# Altium PCB FOOTPRINT.PcbDoc (part 1 of 2)
Units mm, origin at the board's own origin, x right, y up, seen from the top; angles counter-clockwise.
Board outline 50 x 70 mm, 4 copper layers (Top Layer, Int1 (GND), Int2 (PWR), Bottom Layer), stack 1.446 mm thick; 76 components, 55 nets, 299 pads, 366 vias.
Unrouted connection lines stored in the file: 3.
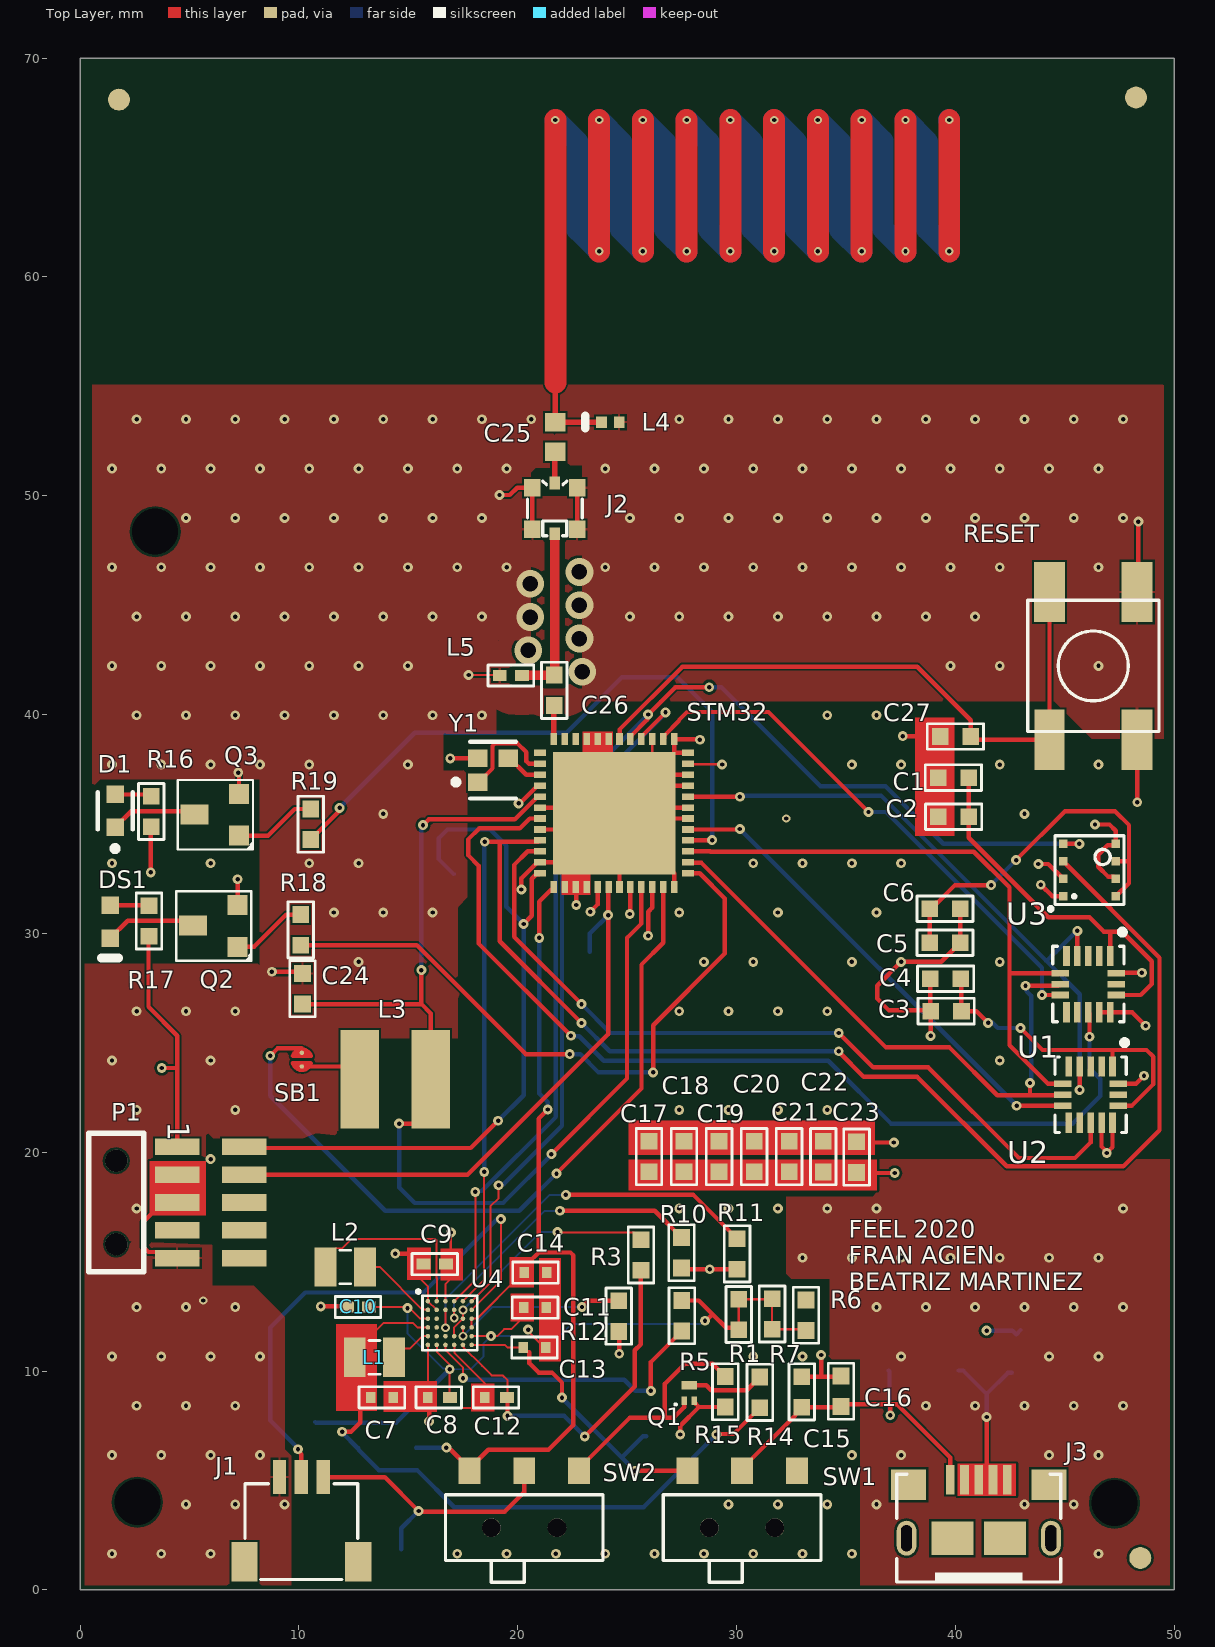
[diagram p0: Top Layer view]
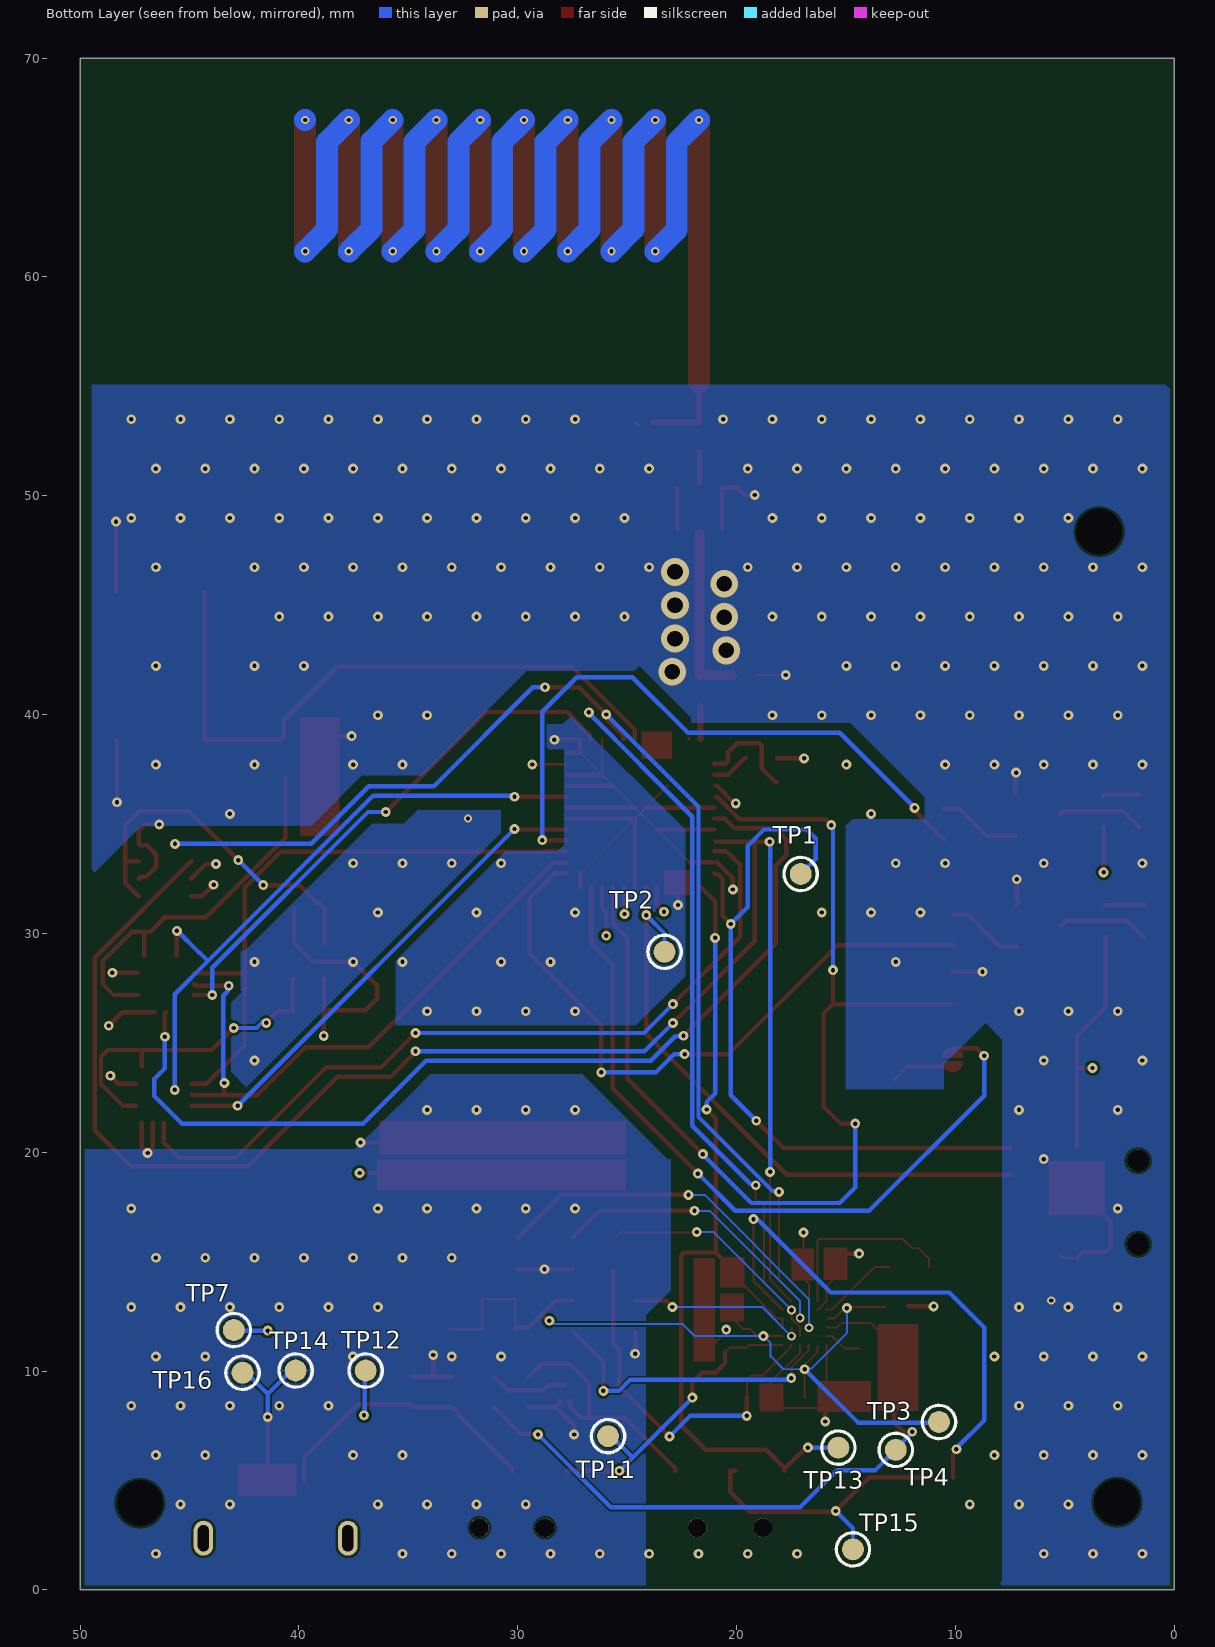
[diagram p1: Bottom Layer view, seen from below]
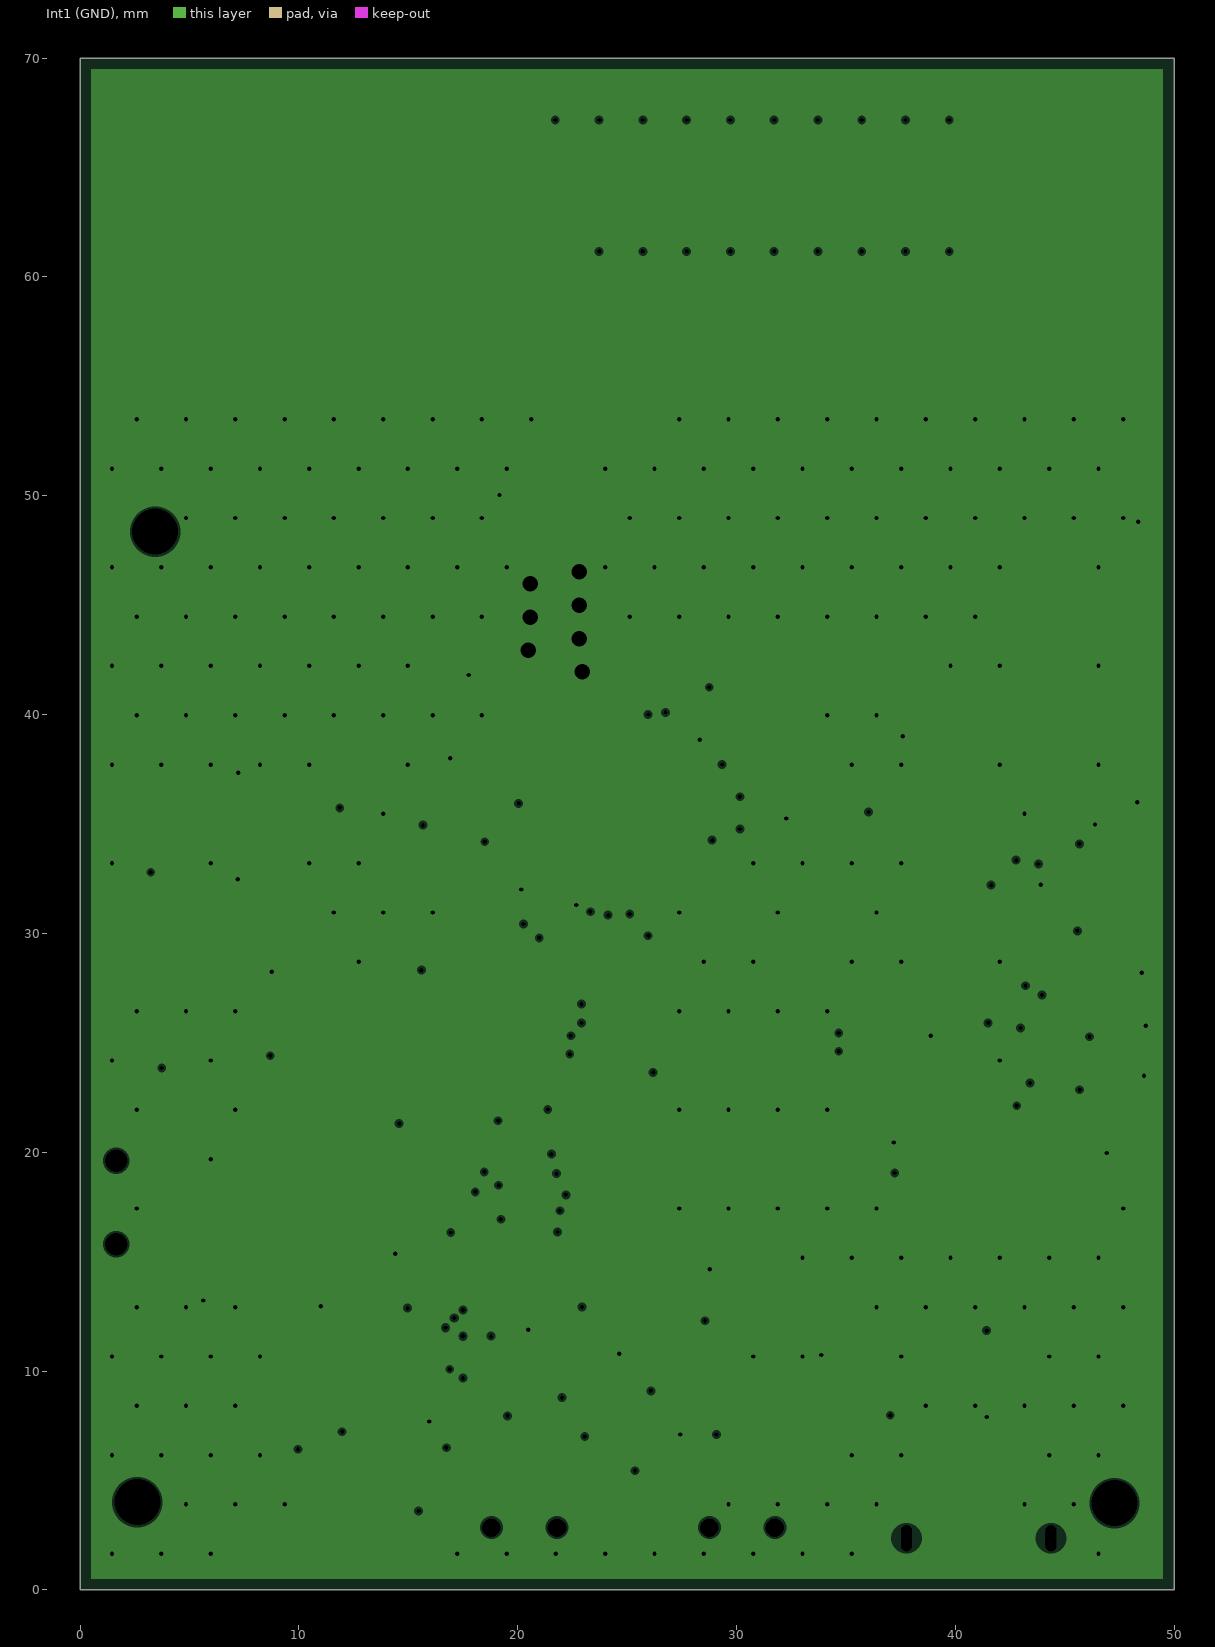
[diagram p2: Int1 (GND), clearances drawn from the general rule]
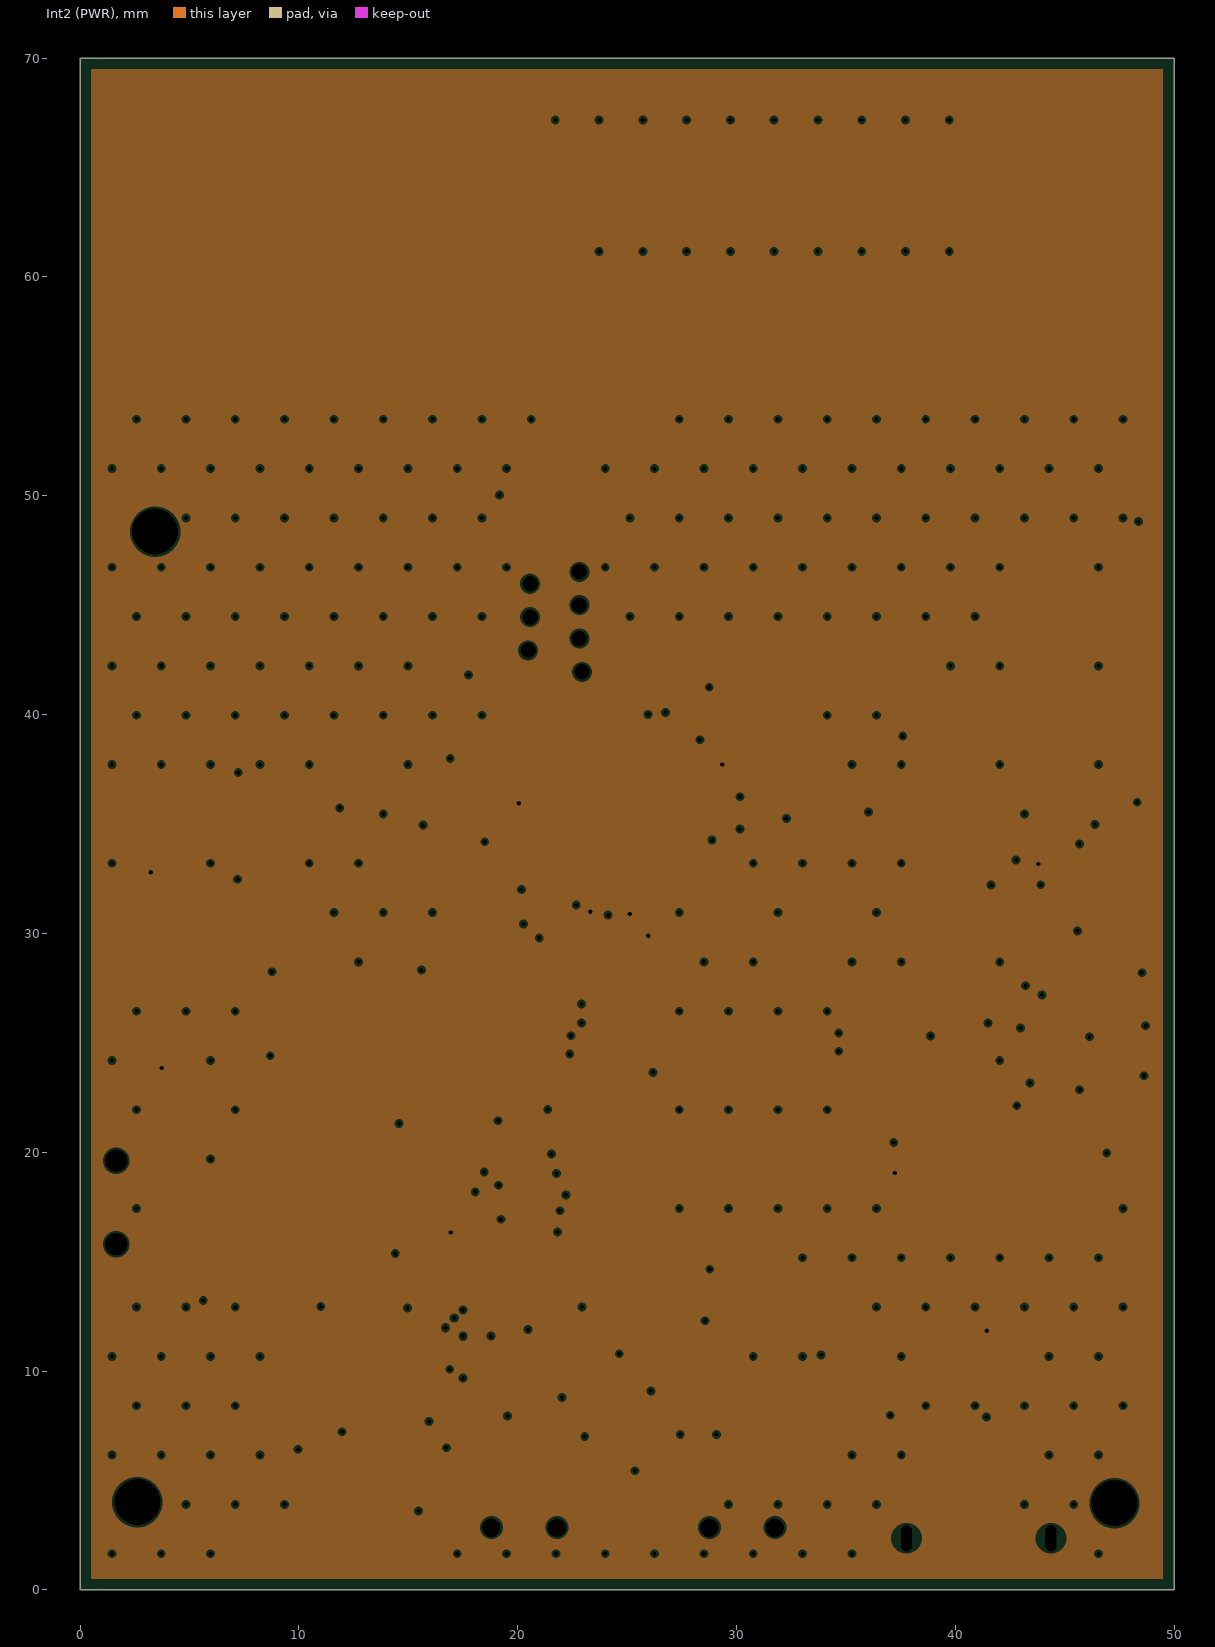
[diagram p3: Int2 (PWR), clearances drawn from the general rule]

## Layer stack, top to bottom
Top Solder: solder mask 0.0254, SM-001, Dk 4
Top Layer: signal copper 0.035
Dielectric 1: prepreg 0.1295, PP-017, Dk 4.3
Dielectric 2: prepreg 0.1295, PP-017, Dk 4.3
Int1 (GND): plane copper 0.035, net GND
Dielectric 3: core 0.7874, Core-040, Dk 4.6
Int2 (PWR): plane copper 0.035, net 3.3VDD
Dielectric 4: prepreg 0.1295, PP-017, Dk 4.3
Dielectric 5: prepreg 0.1295, PP-017, Dk 4.3
Bottom Layer: signal copper 0.035
Bottom Solder: solder mask 0.0254, SM-001, Dk 4

## Board outline
0,0 50,0 50,70 0,70

## Design rules (kind name [scope] priority, off if disabled: settings)
BoardOutlineClearance [All] p1: gap=0.2 ignorepadtopadclearanceinfootprint=FALSE
Clearance [All] p1: gap=0.102 ignorepadtopadclearanceinfootprint=FALSE except(0.01: Arc-SMDPad Arc-Via Track-SMDPad Track-Via; 0.05: Arc-Arc Arc-Track Track-Track SMDPad-Via; 0.09: Arc-Fill Arc-Poly Arc-Region Track-Fill Track-Poly Track-Region; 0.1: Arc-Hole Track-Hole SMDPad-Hole THPad-Hole Via-Hole Fill-Hole Poly-Hole Region-Hole Text-Hole; 0.127: THPad-Via Via-Via Via-Fill Via-Poly Via-Region Via-Text)
ComponentClearance [All] p1: gap=0.102 collisioncheckmode=3 verticalgap=0.102 showdistances=TRUE
DiffPairsRouting [All] p1: maxlimit=0.102 minlimit=0.102 mostfreqgap=0.102 toplayer_minwidth=0.102 toplayer_maxwidth=1816.048 toplayer_prefwidth=0.102 bottomlayer_minwidth=0.102 bottomlayer_maxwidth=1816.048 bottomlayer_prefwidth=0.102 maxuncoupledlength=12.7
Height [All] p1: minheight=0 maxheight=1816.048 prefheight=12.7
HoleSize [All] p1: absolutevalues=TRUE maxlimit=6.3 minlimit=0.2 maxpercent=80.000 minpercent=20.000
HoleToHoleClearance [All] p1: gap=0.25 allowstackedmicrovias=FALSE
MinimumAnnularRing [All] p1: minimumring=0.076
MinimumSolderMaskSliver [All] p1: minsoldermaskwidth=0.1
PlaneClearance [All] p1: clearance=0.102
PlaneConnect PlaneConnectPowerPads [InPadClass('PowerPads')] p1: planeconnectstyle=Direct reliefexpansion=0.508 reliefentries=4 reliefconductorwidth=0.254 reliefairgap=0.254
PlaneConnect [All] p2: pad.planeconnectstyle=Relief pad.reliefexpansion=0.3 pad.reliefentries=4 pad.reliefconductorwidth=0.102 pad.reliefairgap=0.102 via.planeconnectstyle=Direct via.reliefexpansion=0.3 via.reliefentries=4 via.reliefconductorwidth=0.127 via.reliefairgap=0.127
PolygonConnect PolygonConnectPowerPads [All vs (InPadClass('PowerPads'))] p1: connectstyle=Direct reliefconductorwidth=0.254 reliefentries=4 polygonreliefangle="90 Angle" airgapwidth=0.254
PolygonConnect [All] p2: thpad.connectstyle=Relief thpad.reliefconductorwidth=0.102 thpad.reliefentries=4 thpad.polygonreliefangle="90 Angle" thpad.airgapwidth=0.102 smdpad.connectstyle=Relief smdpad.reliefconductorwidth=0.102 smdpad.reliefentries=4 smdpad.polygonreliefangle="90 Angle" smdpad.airgapwidth=0.102 via.connectstyle=Direct via.reliefconductorwidth=0.127 via.reliefentries=4 via.polygonreliefangle="90 Angle" via.airgapwidth=0.127
RoutingVias [All] p1: holewidth=0.1 width=0.25 viastyle="Through Hole" minholewidth=0.1 minwidth=0.2 maxholewidth=6.3 maxwidth=6.55
SilkToSilkClearance [All] p1: silktosilkclearance=0
SilkToSolderMaskClearance [IsPad] p1: minsilkscreentomaskgap=0.102 clearancetoexposedcopper=TRUE
SolderMaskExpansion [All] p1: expansion=0.075 istentingtop=FALSE
Width [All] p1: maxlimit=1816.048 minlimit=0.09 preferedwidth=0.102 minimp=50.000000 maximp=50.000000 favimp=50.000000
20 further rules are at their usual default settings.

## Classes and differential pairs
component class U_STM32_breakout: *1 C17 C18 C19 C20 C21 C22 C23 C24 C25 C26 J2 L3 L4 L5 SB1 STM32 Y1
component class Sensors: C1 C2 C3 C4 C5 C6 U1 U2 U3
component class JTAG: P1 TP1 TP2
component class Connections: C27 D1 DS1 Q2 Q3 R16 R17 R18 R19 RESET
component class Bateria: C7 C8 C9 C10 C11 C12 C13 C14 C15 C16 J1 J3 L1 L2 Q1 R1 R3 R5 R6 R7 R10 R11 R12 R14 R15 SW1 SW2 TP3 TP4 TP7 TP11 TP12 TP13 TP14 TP15 TP16 U4

## Components (designator, comment, footprint, x,y, rotation, side; value= is the part's Value field where it differs from the comment)
C1 "100nF" 0603C-GENERIC 40.607,37.119 r180 top
C2 "100nF" 0603C-GENERIC 40.615,35.331 r180 top
C3 "100nF" 0603C-GENERIC 40.275,26.45 r180 top
C4 "100nF" 0603C-GENERIC 40.25,27.925 r180 top
C5 "100nF" 0603C-GENERIC 38.826,29.573 r0 top
C6 "100nF" 0603C-GENERIC 38.828,31.125 r0 top
C7 "22uF" 0402C-TBD#1 13.284,8.8 r0 top
C8 "1uF" 0402C-GENERIC#1 16.9,8.8 r180 top
C9 "2nF" 0402C-TBD#2 16.713,14.884 r180 top
C10 "1uF" 0402C-GENERIC#2 13.208,12.929 r180 top
C11 "10uF" 0402C-GENERIC#3 20.284,12.9 r0 top
C12 "1uF" 0402C-GENERIC#1 19.516,8.8 r180 top
C13 "2u2" 0402C-GENERIC#3 20.258,11.074 r0 top
C14 "4u7" 0402C-GENERIC#3 20.3,14.5 r0 top
C15 "10uF" 0603C-GENERIC 32.975,8.35 r90 top
C16 "100nF" 0603C-GENERIC 34.775,8.378 r90 top
C17 "100nF" 0603C-GENERIC 26,19.103 r90 top
C18 "100nF" 0603C-GENERIC 27.6,19.103 r90 top
C19 "4u7" 0603C-GENERIC 29.2,19.103 r90 top
C20 "4u7" 0603C-GENERIC 30.8,19.103 r90 top
C21 "4u7" 0603C-GENERIC 32.4,19.103 r90 top
C22 "10nF" 0603C-GENERIC 33.96,19.101 r90 top
C23 "1uF" 0603C-GENERIC 35.484,19.075 r90 top
C24 "470nF" 0603C-GENERIC 10.16,26.772 r90 top
C25 "GRM1885C1H1R0CA01D" CAPC1608X90X35NL10T15 21.717,52.68 r90 top
C26 "TBD" 0603C-GENERIC 21.666,40.411 r90 top
C27 "100nF" 0603C-GENERIC 40.697,39 r180 top
D1 "LTST-C190GKT" FP-LTST-C190GKT-MFG 1.6,35.6 r90 top
DS1 "LTST-C190AKT" LTST-C190AKT-2_V 1.372,30.531 r270 top
J1 "HDR-3, 1mm" SM03B-SRSS-TB 10.109,5.156 r0 top
J2 "MM8130-2600" COAXIAL-SWF 21.692,49.42 r0 top
J3 "MicroUSB-B" USB-Micro-B-RA-SMD-PiP 41.066,5.037 r90 top
L1 "2.2µH" INDC2016X18N 13.551,10.623 r180 top
L2 "2.2µH" INDC2016X18N 12.217,14.757 r180 top
L3 "744773115" WE-PD2-S 14.402,23.343 r0 top
L4 "LQG15HS12NJ02D" INDC1005X55X25LL05T10_A 24.232,53.365 r0 top
L5 "TBD" 0402C-TBD#2 20.193,41.783 r180 top
P1 "Pin Header 2x5" HDR_2x5-SMD-1.27mm-ANG 5.97,17.704 r270 top
Q1 "RV2C010UNT2L" DFN65P100X40-3L 27.838,8.997 r90 top
Q2 "MMBT2222" SOT23-BCE 7.188,29.388 r180 top
Q3 "MMBT2222" SOT23-BCE 7.264,34.468 r180 top
R1 "2R2" 0603R-GENERIC 30.099,11.887 r90 top
R3 "10K" 0603R-10K 25.629,16.002 r270 top
R5 "N.C." 0603R-GENERIC 27.5,13.225 r270 top
R6 "1M" 0603R-GENERIC 33.175,11.853 r90 top
R7 "2R2" 0603R-GENERIC 31.623,11.913 r90 top
R10 "1M" 0603R-GENERIC 27.483,14.707 r90 top
R11 "10K" 0603R-10K 30.023,16.053 r270 top
R12 "10K" 0603R-10K 24.612,13.208 r270 top
R14 "1K" 0603R-1k 31.064,8.331 r90 top
R15 "10M" 0603R-GENERIC 29.489,9.754 r270 top
R16 "47R" 0603R-47 3.251,34.874 r90 top
R17 "47R" 0603R-47 3.15,31.267 r270 top
R18 "1K" 0603R-1k 10.084,29.464 r90 top
R19 "1K" 0603R-1k 10.541,34.29 r90 top
RESET "PB SW" Switch-PB-6.2x6.3mm-SMD 46.3,42.225 r90 top
SB1 "Solderbridge" Solderbridge 10.135,24.232 r270 top
STM32 "STM32WLE5CC" stm32wle5cc 24.4,35.5 r180 top
SW1 "AYZ0102AGRLC" AYZ0102AGRLC 30.253,2.845 r0 top
SW2 "AYZ0102AGRLC" AYZ0102AGRLC 20.295,2.845 r0 top
TP1 "Ø1.0mm,SMD" TP_SMD_Ø1.0mm 17.069,32.715 r180 bottom
TP2 "Ø1.0mm,SMD" TP_SMD_Ø1.0mm 23.292,29.159 r90 bottom
TP3 "Ø1.0mm,SMD" TP_SMD_Ø1.0mm 10.75,7.675 r90 bottom
TP4 "Ø1.0mm,SMD" TP_SMD_Ø1.0mm 12.725,6.4 r90 bottom
TP7 "Ø1.0mm,SMD" TP_SMD_Ø1.0mm 42.975,11.875 r90 bottom
TP11 "Ø1.0mm,SMD" TP_SMD_Ø1.0mm 25.875,7.025 r90 bottom
TP12 "Ø1.0mm,SMD" TP_SMD_Ø1.0mm 36.95,10.025 r90 bottom
TP13 "Ø1.0mm,SMD" TP_SMD_Ø1.0mm 15.35,6.5 r90 bottom
TP14 "Ø1.0mm,SMD" TP_SMD_Ø1.0mm 40.15,10.025 r90 bottom
TP15 "Ø1.0mm,SMD" TP_SMD_Ø1.0mm 14.681,1.854 r90 bottom
TP16 "Ø1.0mm,SMD" TP_SMD_Ø1.0mm 42.577,9.924 r90 bottom
U1 "ADXL362" LGA50P322X300X114-16N 46.076,27.686 r270 top
U2 "ADXL372" LGA50P322X300X114-16N 46.177,22.631 r270 top
U3 "BME680" BME680 46.126,32.893 r180 top
U4 "ADP536x" BGA32C40P6X6_238X238X56 16.896,12.196 r0 top locked
Y1 "402F32011CAR" FP-402-MFG 18.872,37.465 r0 top

## Footprints (in the part's own frame and the unit in brackets; to place one, negate y for a bottom-side part, rotate by r counter-clockwise, add the part's x,y. Pads: shape width x height; smd on the part's side, far side on the other; paste and mask are expansions set on the pad)
0402C-GENERIC#1 [mil]
  rect 25x20 smd: 1(0,0)
  rect 17.13x20 smd: 2(40,0)
  silkscreen extent -21,-19 61,19
0402C-GENERIC#2 [mil]
  rect 25x20 smd: 1(0,0) 2(40,0)
  silkscreen extent -21,-19 61,19
0402C-GENERIC#3 [mil]
  rect 17.13x20 smd: 1(0,0) 2(40,0)
  silkscreen extent -21,-19 61,19
0402C-TBD#1 [mil]
  rect 17.13x20 smd: 1(0,0) 2(40,0)
  silkscreen extent -21,-19 61,19, body extent 2,-9 39,9, height 19
0402C-TBD#2 [mil]
  rect 25x20 smd: 1(0,0) 2(40,0)
  silkscreen extent -21,-19 61,19, body extent 2,-9 39,9, height 19
0603C-GENERIC [mil] "CAPACITOR 0603"
  rect 30x30 smd: 1(0,0) 2(55,0)
  silkscreen extent -23,-23 78,23, body extent -4,-15 59,15, height 19
0603R-1k [mil] "RESISTOR 0603"
  rect 30x30 smd: 1(0,0) 2(55,0)
  silkscreen extent -23,-23 78,23, body extent -4,-15 59,15, height 20
0603R-10K [mil] "RESISTOR 0603"
  rect 30x30 smd: 1(0,0) 2(55,0)
  silkscreen extent -23,-23 78,23, body extent -4,-15 59,15, height 20
0603R-47 [mil] "RESISTOR 0603"
  rect 30x30 smd: 1(0,0) 2(55,0)
  silkscreen extent -23,-23 78,23, body extent -4,-15 59,15, height 20
0603R-GENERIC [mil] "RESISTOR 0603"
  rect 30x30 smd: 1(0,0) 2(55,0)
  silkscreen extent -23,-23 78,23, body extent -4,-15 59,15, height 19
AYZ0102AGRLC [mm]
  round 0.85 hole 0.85 unplated: 0(-1.5,0) 0(1.5,0)
  rect 1x1.2 smd: 1(-2.5,2.6) 2(0,2.6) 3(2.5,2.6)
  silkscreen extent -3.6,-2.5 3.6,1.5, body extent -3.6,-2.5 3.6,2.8, height 1.5
BGA32C40P6X6_238X238X56 [mm]
  round 0.21 smd mask+0.05: A1(-1,1) A2(-0.6,1) A3(-0.2,1) A4(0.2,1) A5(0.6,1) A6(1,1) B1(-1,0.6) B2(-0.6,0.6) B3(-0.2,0.6) B4(0.2,0.6) B5(0.6,0.6) B6(1,0.6) C1(-1,0.2) C2(-0.6,0.2) C5(0.6,0.2) C6(1,0.2) D1(-1,-0.2) D2(-0.6,-0.2) D5(0.6,-0.2) D6(1,-0.2) E1(-1,-0.6) E3(-0.2,-0.6) E4(0.2,-0.6) E5(0.6,-0.6) E6(1,-0.6) F1(-1,-1) F2(-0.6,-1) F3(-0.2,-1) F4(0.2,-1) F5(0.6,-1) F6(1,-1) ""(-0.6,-0.6)
  silkscreen extent -1.49,-1.25 1.25,1.49, body extent -1.19,-1.19 1.19,1.19, height 0.56
BME680 [mm]
  rect 0.4x0.4 smd mask+0.1: 1(1.2,1.2) 2(1.2,0.4) 3(1.2,-0.4) 4(1.2,-1.2) 5(-1.2,-1.2) 6(-1.2,-0.4) 7(-1.2,0.4) 8(-1.2,1.2)
  silkscreen extent -1.58,-1.58 1.82,1.82, body extent -1.5,-1.5 1.5,1.5, height 0.93
CAPC1608X90X35NL10T15 [mm] "Chip Capacitor, 2-Leads, Body 1.60x0.80mm, IPC Medium Density"
  rect 0.85x0.95 smd: 1(-0.675,0) 2(0.675,0)
  body extent -0.85,-0.45 0.85,0.45, height 0.9
COAXIAL-SWF [mm]
  rect 0.5x0.58 smd: 1(0,1.16) 3(0,-1.16)
  rect 0.75x0.8 smd: 2(-1.025,-0.95) 2(-1.025,0.95) 2(1.025,-0.95) 2(1.025,0.95)
  Top Layer pour cut-out: 0.65,-0.55 -0.65,-0.55 -0.65,-1.35 0.65,-1.35
  Top Layer pour cut-out: -0.65,0.55 0.65,0.55 0.65,1.35 -0.65,1.35
  silkscreen extent -1.25,-1.25 1.25,1.25, body extent -1.26,-1.3 1.26,1.3, height 1.55
DFN65P100X40-3L [mm]
  rect 0.4x0.25 smd: 1(-0.35,0.225) 2(-0.35,-0.225)
  rect 0.4x0.7 smd: 3(0.35,0)
  silkscreen extent -0.57,0.57 -0.48,0.67, body extent -0.53,-0.32 0.52,0.33, height 0.4
FP-402-MFG [mm]
  rect 0.9x0.8 smd paste+0 mask+0: 1(-0.7,-0.55) 3(0.7,0.55) 4(-0.7,0.55)
  rect 0.9x0.8 on Plane1 paste+0 mask+0: 2(0.7,-0.55)
  silkscreen extent -1.82,-1.3 1.05,1.3, body extent -1.25,-1.05 1.25,1.05, height 0.25
FP-LTST-C190GKT-MFG [mm]
  rect 0.8x0.8 smd paste+0 mask+0: 1(-0.75,0) 2(0.75,0)
  silkscreen extent -1.85,-0.8 0.85,0.8, body extent -1.25,-0.55 1.25,0.55, height 0.25
HDR_2x5-SMD-1.27mm-ANG [mm]
  round 1.02 hole 1.02 unplated: 0(-1.905,-4.32) 0(1.905,-4.32)
  rect 0.76x2.03 smd: 1(-2.54,-1.525) 2(-2.54,1.525) 3(-1.27,-1.525) 4(-1.27,1.525) 5(0,-1.525) 6(0,1.525) 7(1.27,-1.525) 8(1.27,1.525) 9(2.54,-1.525) 10(2.54,1.525)
  silkscreen extent -3.17,-5.57 3.17,-3.07, body extent -3.18,-8.63 3.17,2.27, height 3.41
INDC1005X55X25LL05T10_A [mm] "Chip Inductor, 2-Leads, Body 1.05x0.55mm, IPC High Density"
  rect 0.49x0.52 smd: 1(-0.405,0) 2(0.405,0)
  silkscreen extent -1.15,-0.28 -1.15,0.28, body extent -0.52,-0.28 0.53,0.28, height 0.55
INDC2016X18N [mm]
  rect 1x1.8 smd: 1(-0.8,0) 2(1,0)
  silkscreen extent -0.15,-0.77 0.35,0.77, body extent -0.9,-0.8 1.1,0.8, height 1
LGA50P322X300X114-16N [mm]
  rect 0.925x0.3 smd mask+0.06: 1(-1.288,1) 2(-1.288,0.5) 3(-1.288,0) 4(-1.288,-0.5) 5(-1.288,-1) 9(1.288,-1) 10(1.288,-0.5) 11(1.288,0) 12(1.288,0.5) 13(1.288,1)
  rect 0.3x0.8 smd mask+0.06: 6(-0.5,-1.275) 7(0,-1.275) 8(0.5,-1.275) 14(0.5,1.275) 15(0,1.275) 16(-0.5,1.275)
  silkscreen extent -2.5,-1.62 1.72,1.68, body extent -1.65,-1.55 1.65,1.55, height 1.14
LTST-C190AKT-2_V [mm] "SMD, 2-Leads, Body 1.6x0.8mm"
  rect 0.8x0.8 smd: 1(-0.75,0) 2(0.75,0)
  silkscreen extent 1.65,-0.4 1.65,0.4, body extent -0.8,-0.4 0.8,0.4, height 0.8
SM03B-SRSS-TB [mm]
  rect 1.2x1.8 smd: 0(-2.6,-3.875) 0(2.6,-3.875)
  rect 0.6x1.55 smd: 1(-1,0) 2(0,0) 3(1,0)
  silkscreen extent -2.57,-4.68 2.58,-0.3, body extent -2.5,-4.61 2.5,0.34, height 2.95
Solderbridge [mm]
  round 0.2 smd paste-10: 1(-0.312,0) 2(0.312,0)
  Top Layer region: -0.077,-0.432 -0.152,-0.505 -0.271,-0.467 -0.335,-0.424 -0.409,-0.351 -0.462,-0.292 -0.521,-0.193 -0.549,-0.099 -0.544,0.122 -0.518,0.193 -0.434,0.33 -0.351,0.411 -0.259,0.469 -0.157,0.5 -0.107,0.483 -0.077,0.43
  Top Layer region: 0.077,0.432 0.152,0.505 0.271,0.467 0.335,0.424 0.409,0.351 0.462,0.292 0.521,0.193 0.549,0.099 0.544,-0.122 0.518,-0.193 0.434,-0.33 0.351,-0.411 0.259,-0.469 0.157,-0.5 0.107,-0.483 0.077,-0.43
  Top Layer lines w0.152: 0.153,-0.431 ccw(c0.042,0) 0.312,-0.353 ccw(c0.042,0) 0.381,-0.288 ccw(c0.042,0) 0.461,-0.149 ccw(c0.042,0) 0.312,0.353 ccw(c0.042,0) 0.153,0.431 ; -0.153,-0.431 cw(c-0.042,0) -0.254,-0.391 cw(c-0.042,0) -0.258,-0.389 cw(c-0.042,0) -0.487,0 cw(c-0.042,0) -0.258,0.389 cw(c-0.042,0) -0.254,0.391 cw(c-0.042,0) -0.153,0.431
SOT23-BCE [mil]
  rect 36x36 smd mask+1.97: B(0,0)
  rect 50x36 smd mask+1.97: C(80,-38)
  rect 36x36 smd: E(0,-75)
  silkscreen extent -25,-100 110,25, body extent -3,-95 94,20, height 41
stm32wle5cc [mm]
  rect 0.55x0.3 smd mask+0.05: 1(-3.375,2.75) 2(-3.375,2.25) 3(-3.375,1.75) 4(-3.375,1.25) 5(-3.375,0.75) 6(-3.375,0.25) 7(-3.375,-0.25) 8(-3.375,-0.75) 9(-3.375,-1.25) 10(-3.375,-1.75) 11(-3.375,-2.25) 12(-3.375,-2.75) 25(3.375,-2.75) 26(3.375,-2.25) 27(3.375,-1.75) 28(3.375,-1.25) 29(3.375,-0.75) 30(3.375,-0.25) 31(3.375,0.25) 32(3.375,0.75) 33(3.375,1.25) 34(3.375,1.75) 35(3.375,2.25) 36(3.375,2.75)
  rect 0.3x0.55 smd mask+0.035: 13(-2.75,-3.375)
  rect 0.3x0.55 smd mask+0.05: 14(-2.25,-3.375) 15(-1.75,-3.375) 16(-1.25,-3.375) 17(-0.75,-3.375) 18(-0.25,-3.375) 19(0.25,-3.375) 20(0.75,-3.375) 21(1.25,-3.375) 22(1.75,-3.375) 23(2.25,-3.375) 24(2.75,-3.375) 37(2.75,3.375) 38(2.25,3.375) 39(1.75,3.375) 40(1.25,3.375) 41(0.75,3.375) 42(0.25,3.375) 43(-0.25,3.375) 44(-0.75,3.375) 45(-1.25,3.375) 46(-1.75,3.375) 47(-2.25,3.375) 48(-2.75,3.375)
  rect 5.6x5.6 smd: 49(0,0)
  body extent -3.51,-3.51 3.51,3.51, height 0.5
Switch-PB-6.2x6.3mm-SMD [mm]
  rect 2.75x1.39 smd: 1(-3.375,2)
  rect 2.75x1.4 smd: 1(3.375,2) 2(-3.375,-2) 2(3.375,-2)
  silkscreen extent -3,-3 3,3, body extent -4,-3 4,3.3, height 3.1
TP_SMD_Ø1.0mm [mm]
  round 1 smd paste-5: 1(0,0)
  silkscreen extent -0.76,-0.76 0.76,0.76
USB-Micro-B-RA-SMD-PiP [mm]
  rect 1.35x0.4 smd: 1(0,1.3) 2(0,0.65) 3(0,0) 4(0,-0.65) 5(0,-1.3)
  oval 1.6x0.9 hole 0.5 slot 1.2 at 0 deg: 6(-2.675,3.3) 6(-2.675,-3.3)
  oval 2x1.5 on Top Paste: 6(-2.675,3.3) 6(-2.675,-3.3)
  rect 1.55x1.9 smd: 6(-2.675,-1.2) 6(-2.675,1.2)
  rect 1.4x1.6 smd: 6(-0.225,3.2) 6(-0.225,-3.2)
  silkscreen extent -4.75,-3.75 0.25,3.75, body extent -5.28,-4.1 0.15,4.1, height 2.72
WE-PD2-S [mm] "SMD Inductor, 2-Leads, Body 4.5 x 4.0 mm"
  rect 1.75x4.5 smd: 1(-1.625,0) 2(1.625,0)
  body extent -2.23,-2 2.23,2, height 3.17

## Part data
C1 C2 C3 C4 C5 C6 C17 C18 C27: library part 0603C-100NF-50V-X7R-TDK, "CAPACITOR 0603 CERAMIC", Capacitance=10000pF, Manufacturer="TDK Corporation", Manufacturer Part Number=C1608X7R1H103K, Operating Temperature="-55°C ~ 125°C", Package / Case="0603 (1608 metric)", Supplier Part Number 1=445-1314-2-ND, Temperature Coefficient=X7R, Tolerance=±10%, Voltage - Rated=50V, Category=Capacitors, Features="General Purpose", Lead Spacing=-, Mounting Type="Surface Mount, MLCC", Packaging="Tape & Reel (TR)", Reel=C68, RoHS="RoHS Compliant", Supplier 1=Digi-Key, Thickness=0.80mm
C7 C8 C9 C10 C11 C14: library part 0402C-10UF-4V-X5R-SAM, "CAPACITOR 0402 CERAMIC", Reel=C47
C12: library part 0402C-1UF-25V-X5R-SAM, "CAPACITOR 0402 CERAMIC", Reel=C49
C13: library part 0402C-2U2-10V-X5R-SAM, "CAPACITOR 0402 CERAMIC", Reel=C16
C15: library part 0603C-10UF-10V-X5R-TDK, "CAPACITOR 0603 CERAMIC", Manufacturer="TDK Corporation", Manufacturer Part Number=C1608X5R0J106M, Supplier Part Number 1=445-4112-2-ND, Reel=C31, Supplier 1=Digi-Key
C16: library part 0603C-100NF-25V-X7R-TDK, "CAPACITOR 0603 CERAMIC", Manufacturer="TDK Corporation", Manufacturer Part Number=C1608X7R1E104K, Supplier Part Number 1=445-1316-2-ND, Reel=C12, Supplier 1=Digi-Key
C19 C20 C21: library part 0603C-4U7-6V3-X5R-KEM, "CAPACITOR 0603 CERAMIC", Reel=C36
C22: library part 0603C-10NF-50V-X7R-MUR, "CAPACITOR 0603 CERAMIC", Manufacturer="Murata Electronics North America", Manufacturer Part Number=GRM188R71H103KA01D, Supplier Part Number 1=490-1512-2-ND, Reel=C22, Supplier 1=Digi-Key
C23: library part 0603C-1UF-25V-X5R-SAM, "CAPACITOR 0603 CERAMIC", Reel=C17
C24: library part 0603C-470NF-25V-X7R-MUR, "CAPACITOR 0603 CERAMIC", Capacitance=0.47µF, Manufacturer="Murata Electronics North America", Manufacturer Part Number=GRM188R71E474KA12D, Operating Temperature="-55°C ~ 125°C", Package / Case="0603 (1608 metric)", Supplier Part Number=490-3291-2-ND, Temperature Coefficient=X7R, Tolerance=±10%, Voltage - Rated=25V, Category=Capacitors, Features="General Purpose", Lead Spacing=-, Mounting Type="Surface Mount, MLCC", Packaging="Tape & Reel (TR)", Reel=C14, RoHS="RoHS Compliant", Supplier=Digi-Key, Supplier 1=Digi-Key, Supplier Part Number 1=490-3291-2-ND, Thickness=0.80mm
C25: library part CMP-2006-02464-1, Manufacturer=Murata, Part Number=GRM1885C1H1R0CA01D
C26: library part 0603C-000, "CAPACITOR 0603 CERAMIC"
D1: library part CMP-22017-000005-1, "LED GREEN CLEAR CHIP SMD", Case Code (Imperial)=0603, Case Code (Metric)=1608, Color=Green, Forward Current=30mA, Forward Voltage=2.1V, Lens Color=Colorless, Max Operating Temperature=85°C, Min Operating Temperature=-55°C, Package Quantity=1, Power Dissipation=100mW, Reverse Voltage=5V, Test Current=10mA, Voltage=2V, Case/Package=0603, Depth=0.8mm, Dominant Wavelength=569nm, Height=0.8mm, Illumination Color=Green, Lead Free="Lead Free", Length=1.6mm, Lens Style=Clear, Lens Transparency=Clear, Luminous Intensity=6mcd, Mount="Surface Mount", Number of Elements=1, Number of LEDs=1, Number of Pins=2, Packaging="Tape and Reel", Power Rating=100mW, Radiation Hardening=No, Viewing Angle=130°, Wavelength=565nm, Width=0.8mm
DS1: library part CMP-1674-00006-1, "Single Color Chip LED, 2.1 V, 2 mcd, -55 to 85 degC, 2-Pin SMD, RoHS, Tape and Reel", ComponentLink1Description="Manufacturer URL", ComponentLink1URL=http://www.us.liteon.com/, ComponentLink2Description=Datasheet, ComponentLink2URL=http://datasheet.octopart.com/LTST-C190AKT-Lite-On-datasheet-11729267.pdf, DatasheetVersion=Jan-03, PackageDescription="2-Pin Surface Mount Device, Body 1.6 x 0.8 mm", PackageReference=LTST-C190AKT-2
J1: library part SM03B-SRSS-TB, "1.0mm pitch connector side entry SMD", Manufacturer=JST, Manufacturer Part Number=SM03B-SRSS-TB(LF)(SN), Part number IPS=00000001785, Supplier Part Number 1=455-1803-1-ND, Artikkelnr Noca=N.A., ComponentLink1Description=Datasheet, ComponentLink2Description="Supplier link", Footprint Doc=SM03B-SRSS-TB, HelpURL=http://www.jst-mfg.com/product/pdf/eng/eSH.pdf, LatestRevisionDate=2017-10-09, Note="JST, Header", Part Number=SM03B-SRSS-TB, Pin Count=3, Published=2017-10-09, Publisher="Nordic Semiconductor", Supplier 1=Digi-Key
J2: "Coaxial Connector with Switch", Manufacturer=Murata, Part number IPS=00000009955, Supplier Part Number 1=490-4981-1-ND, Artikkelnr Noca=55029011, ComponentLink1Description=Datasheet, ComponentLink2Description="Supplier link", Footprint Doc=COAXIAL-SWF, HelpURL=http://www.murata.com/products/catalog/pdf/o33e.pdf, LatestRevisionDate=2014-04-24, Manufacturer Part Number=MM8130-2600, Part Number=MM8130-2600, Pin Count=3, Published=2014-04-24, Publisher="Nordic Semiconductor", Supplier 1=Digi-Key, Supplier 2=Mouser, Supplier Part Number 2=81-MM8130-2600RA2
J3: library part MiniUSB-AB-SMT, "MicroUSB-B-SMT", Manufacturer="Allen Creations Corp.", Manufacturer Part Number=AJU55-BS2111-L, Part Number=USB-Micro-B-RA-SMD-PiP, Part number IPS=00000007790, Artikkelnr Noca=55029020, ComponentLink1Description=Datasheet, ComponentLink2Description="Supplier link", Footprint Doc=USB-Micro-B-RA-SMD-PiP, HelpURL="\\hizz\pro\app9717\Datasheet\connectores\Allen Creations Corp\AJU-211.pdf", LatestRevisionDate=2016-04-21, Pin Count=5, Published=2014-10-07, Publisher="Nordic Semiconductor", Supplier 1=Cabcon, Supplier 2=Digi-Key, Supplier Part Number 1=AJU55-BS2111-L, Supplier Part Number 2=609-4616-1-ND
L1 L2: library part LQM2MPN4R7NG0L, "Inductor Power Chip Shielded Multi-Layer 4.7uH 30% 1MHz Ferrite 1.1A 175mOhm DCR 0806 T/R", Package=None, Availability=Unavailable, MP=LQM2MPN4R7NG0L, Price=None
L3: library part CMP-0227-00515-1, "SMD Power Inductor WE-PD2, L = 15.0 µH", Inductance="15.0 ÂµH", ComponentLink1Description="Manufacturer Link", ComponentLink1URL=http://www.we-online.com, ComponentLink2Description=Datasheet, ComponentLink2URL=http://www.we-online.de/katalog/media/pdf/744773115.pdf, DatasheetVersion="ver 1, Oct-2004", PackageDescription="SMD Inductor, 2-Leads, Body 4.5 x 4.0 mm", PackageReference=WE-PD2-S, PackageVersion=2004
L4: library part CMP-2000-06576-1, "Chip Inductor, 12 nH, +/-5%, 300 mA, -55 to 125 degC, 0402 (1005 Metric), RoHS, Tape and Reel", Case Size/Dimension=0402, DC Resistance=0.28O, Inductance-Nom=12nH, Manufacturer=Murata, Package Description="2-Pin Surface Mount Device, Body 1 x 0.5 mm", Rated Current-Max=300mA, Tolerance (%)=±5%, Datasheet URL=http://search.murata.co.jp/Ceramy/image/img/PDF/ENG/L0075S0083LQG15HS.pdf, Datasheet Version=09/2010, Manufacturer URL=http://www.murata.com/, Mounting Technology=SurfaceMount, Package Reference=0402
L5: library part INDUCTOR, "INDUCTOR"
P1: library part "Pin Header 2x5 SMD, 1.27mm, Angled", "Pin Header 2x5, 1.27mm (50mil)", Manufacturer=Samtec, Manufacturer Part Number=FTSH-105-01-L-DH-A-C-TR, Part number IPS=00000007800, Artikkelnr Noca=N.A., ComponentLink1Description=Datasheet, ComponentLink2Description="Supplier link", Footprint Doc=HDR_2x5-SMD-1.27mm-ANG, HelpURL=http://www.samtec.com/documents/webfiles/pdf/FTSH_SMT.PDF, LatestRevisionDate=2014-01-22, Part Number="Pin Header 2x5 SMD, 1.27mm, Angled", Pin Count=10, Published=2014-01-22, Publisher="Nordic Semiconductor", Supplier 1=Samtec, Supplier Part Number 1=FTSH-105-01-L-DH-A-C-TR
Q1: "N-Channel MOSFET, 20V, 1A, 470mOhm, 400mW", Manufacturer="Rohm Semiconductor", Part number IPS=N.A., Supplier Part Number 1=RV2C010UNT2LCT-ND, Artikkelnr Noca=35010020, ComponentLink1Description=Datasheet, ComponentLink2Description="Supplier link", Footprint Doc=DFN-3, HelpURL=http://rohmfs.rohm.com/en/products/databook/datasheet/discrete/transistor/mosfet/rv2c010unt2l-e.pdf, LatestRevisionDate=2016-08-09, Manufacturer Part Number=RV2C010UNT2L, Part Number=RV2C010UNT2L, Pin Count=3, Published=2016-08-09, Publisher="Nordic Semiconductor", Supplier 1=Digi-Key, Supplier 2=Mouser, Supplier Part Number 2=755-RV2C010UNT2L
Q2 Q3: "BC847 SMALL SIGNAL NPN TRANSISTOR", Supplier Part Number 1=MMBT2222A-FDICT-ND, Supplier 1=Digi-Key
R1 R7: library part 0603R-000, "2R2 Resistor"
R3 R11 R12: library part 0603R-10K, "GENERIC RESISTOR 0603", Case="0603 (1608 metric)", Manufacturer="Stackpole Electronics Inc", Manufacturer Part Number="RMCF 1/16 10K 1% R", Power (Watts)="0.1W, 1/10W", Resistance In Ohms=10.0K, Supplier Part Number=RMCF1/1610KFRDKR-ND, Supplier Part Number 1=RMCF0603FT10K0DKR-ND, Temperature Coefficient=±100ppm/°C, Tolerance=±1%, Category=Resistors, Composition="Thick Film", Lead Style="Surface Mount (SMD - SMT)", Packaging=Digi-Reel®, Reel=R21, RoHS="RoHS Compliant", Supplier=Digi-Key, Supplier 1=Digi-Key
R5: library part 0603R-000
R6 R10: library part 0603R-1M, "GENERIC RESISTOR 0603", Case="0603 (1608 metric)", Manufacturer="Stackpole Electronics Inc", Manufacturer Part Number="RMCF 1/16 1M 1% R", Power (Watts)="0.1W, 1/10W", Resistance In Ohms=1.00M, Supplier Part Number=RMCF1/161MFRTR-ND, Supplier Part Number 1=RMCF0603FT1M00TR-ND, Temperature Coefficient=±100ppm/°C, Tolerance=±1%, Category=Resistors, Composition="Thick Film", Lead Style="Surface Mount (SMD - SMT)", Packaging="Tape & Reel (TR)", Reel=R51, RoHS="RoHS Compliant", Supplier=Digi-Key, Supplier 1=Digi-Key
R14 R18 R19: library part 0603R-1K, "GENERIC RESISTOR 0603", Manufacturer="Stackpole Electronics Inc", Manufacturer Part Number="RMCF 1/16 1K 1% R", Supplier Part Number 1=RMCF0603FT1K00TR-ND, Reel=R14, Supplier 1=Digi-Key
R15: library part 0603R-10M, "GENERIC RESISTOR 0603", Case="0603 (1608 metric)", Manufacturer="Stackpole Electronics Inc", Manufacturer Part Number="RMCF 1/16 10M 5% R", Power (Watts)="0.1W, 1/10W", Resistance In Ohms=10.0M, Supplier Part Number=RMCF1/1610MJRTR-ND, Supplier Part Number 1=RMCF0603FT10M0DKR-ND, Temperature Coefficient=±350ppm/°C, Tolerance=±5%, Category=Resistors, Composition="Thick Film", Features=-, Lead Style="Surface Mount (SMD - SMT)", Packaging="Tape & Reel (TR)", Reel=R15, RoHS="RoHS Compliant", Supplier=Digi-Key, Supplier 1=Digi-Key
R16 R17: library part 0603R-47R, "GENERIC RESISTOR 0603", Case="0603 (1608 metric)", Manufacturer="Stackpole Electronics Inc", Manufacturer Part Number="RMC 1/16 47 1% R", Power (Watts)="0.1W, 1/10W", Resistance In Ohms=47.0, Supplier Part Number=RMC1/1647FR-ND, Temperature Coefficient=±100ppm/°C, Tolerance=±1%, Category=Resistors, Composition="Thick Film", Lead Style="Surface Mount (SMD - SMT)", Packaging="Tape & Reel (TR)", RoHS="RoHS Compliant", Supplier=Digi-Key, Supplier 1=Digi-Key, Supplier Part Number 1=RMC1/1647FR-ND
RESET: library part TS604VM1-025BR-R, "Tactile Switch, SPNO, SMD, 160gf, 6.2x6.3x2.5mm", Manufacturer=Dailywell, Part Number=Switch-PB-6.2x6.3mm-SMD, Part number IPS=00000007812, Artikkelnr Noca=50019106, ComponentLink1Description=Datasheet, ComponentLink2Description="Supplier link", Footprint Doc=Switch-PB-6.2x6.3mm-SMD, HelpURL=\\hizz\pro\app9717\Datasheet\switches\Dailywell\TS604VM1-025BR-R.pdf, LatestRevisionDate=2016-04-21, Manufacturer Part Number=TS604VM1-025BR-R, Pin Count=4, Published=2010-02-01, Publisher="Nordic Semiconductor", Supplier 1=Cabcon, Supplier 2=Mouser, Supplier Part Number 1=TS604VM1-025BR-R, Supplier Part Number 2=688-SKHUALE010
SB1: library part SOLDERBRIDGE, Part number IPS=N.A., Artikkelnr Noca=N.A., ComponentLink1Description=Datasheet, ComponentLink2Description="Supplier link", Footprint Doc=Solderbridge, LatestRevisionDate=2009-12-14, Part Number=Solderbridge, Pin Count=2, Published=2009-12-14, Publisher="Nordic Semiconductor"
STM32: "Ultra-low power multi-modulation wireless STM32WLE5 microcontrollers"
SW1 SW2: "Miniature slide switch, SPDT, Right-Angle, ON-ON, 12V, 100mA", Manufacturer=C&K, Part number IPS=N.A., Supplier Part Number 1=401-2012-1-ND, Artikkelnr Noca=N.A., ComponentLink1Description=Datasheet, ComponentLink1URL=https://www.ckswitches.com/media/1431/ayz.pdf, ComponentLink2Description="Supplier link", Footprint Doc=AYZ0102AGRLC, HelpURL=https://www.ckswitches.com/media/1431/ayz.pdf, LatestRevisionDate=2019-05-08, Manufacturer Part Number=AYZ0102AGRLC, Part Number=AYZ0102AGRLC, Pin Count=3, Published=2019-05-08, Publisher="Nordic Semiconductor", Supplier 1=Digi-Key
TP1 TP2 TP3 TP4 TP7 TP11 TP12 TP13 TP14 TP15 TP16: library part TP_SMD_Ø1.0MM, "1.0mm circular SMD testpad", Manufacturer="Nordic Semiconductor", Part number IPS=N.A., Artikkelnr Noca=N.A., ComponentLink1Description=Datasheet, ComponentLink2Description="Supplier link", Footprint Doc=TP_SMD_Ø1.0mm, LatestRevisionDate=2013-06-11, Part Number=TP_SMD_Ø1.0MM, Pin Count=1, Published=2013-06-11, Publisher="Nordic Semiconductor"
U1: "Micropower, 3-Axis, ±2 g/±4 g/±8 g Digital Output MEMS Accelerometer", Manufacturer="Analog Devices", Part number IPS=00000001799, Supplier Part Number 1=ADXL362BCCZ-RL7CT-ND, Artikkelnr Noca=N.A., ComponentLink1Description=Datasheet, ComponentLink1URL=http://www.analog.com/media/en/technical-documentation/data-sheets/ADXL362.pdf, ComponentLink2Description="Supplier link", ComponentLink2URL=http://www.analog.com/en/products/adxl362.html, Footprint Doc=LGA-16, HelpURL=https://www.analog.com/media/en/technical-documentation/data-sheets/ADXL362.pdf, LatestRevisionDate=2019-01-11, Manufacturer Part Number=ADXL362, Part Number=ADXL362, Pin Count=16, Published=2019-01-11, Publisher="Nordic Semiconductor", Supplier 1=Digi-Key, Supplier 2=Mouser, Supplier Part Number 2=584-ADXL362BCCZ-R7
U2: "Micropower, 3-Axis, ±200g digital output acelerometer", Manufacturer="Analog Devices", Part number IPS=00000001798, Supplier Part Number 1=ADXL372BCCZ-RL7CT-ND, Artikkelnr Noca=N.A., ComponentLink1Description=Datasheet, ComponentLink1URL=http://www.analog.com/media/en/technical-documentation/data-sheets/ADXL372.pdf, ComponentLink2Description="Supplier link", ComponentLink2URL=http://www.analog.com/en/products/adxl372.html, Footprint Doc=LGA-16, HelpURL=http://www.analog.com/en/products/adxl372.html, LatestRevisionDate=2018-08-24, Manufacturer Part Number=ADXL372, Part Number=ADXL372, Pin Count=16, Published=2018-08-24, Publisher="Nordic Semiconductor", Supplier 1=Digi-Key
U3: "Low power gas, pressure, temperature & humidity sensor", Manufacturer=Bosch, Part number IPS=00000001800, Supplier Part Number 1=828-1077-1-ND, Artikkelnr Noca=N.A., ComponentLink1Description=Datasheet, ComponentLink1URL=https://ae-bst.resource.bosch.com/media/_tech/media/datasheets/BST-BME680-DS001-00.pdf, ComponentLink2Description="Supplier link", Footprint Doc=LGA-8, LatestRevisionDate=2018-05-24, Manufacturer Part Number=BME680, Part Number=BME680, Pin Count=8, Published=2018-05-24, Publisher="Nordic Semiconductor", Supplier 1=Digi-Key
U4: "Advanced Battery Management PMIC With Ultralow Iq Buck and Buck-Boost", Manufacturer="Analog Devices", Part number IPS=80000001823, Artikkelnr Noca=N.A., ComponentLink1Description=Datasheet, ComponentLink2Description="Supplier link", Footprint Doc=WLCSP-32, LatestRevisionDate=2019-03-25, Manufacturer Part Number=ADP536x, Part Number=ADP536x, Pin Count=32, Published=2019-03-25, Publisher="Nordic Semiconductor"
Y1: library part CMP-06858-000005-1, "CRYSTAL 32.0000MHZ 10PF SMD", Case/Package=SMD/SMT, ESR (Equivalent Series Resistance)=100R, Frequency=32MHz, Frequency Stability=10ppm, Load Capacitance=10pF, Max Operating Temperature=70°C, Min Operating Temperature=-20°C, Package Quantity=3000, Contact Plating=Gold, Frequency Tolerance=10ppm, Height=0.022inch, Length=0.079inch, Mount="Surface Mount", Packaging="Tape and Reel", Series Resistance=100R, Termination=SMD/SMT, Tolerance=10ppm, Width=0.063inch

## Free pads (board coordinates)
  round 2 hole 2.1: 2(47.269,3.962) 3(2.616,4.013) 4(3.429,48.362)
  round 1 smd mask+0.5: 5(1.775,68.1) 6(48.25,68.2) 7(48.45,1.462)

## Via types
v1: diameter 0.45, hole 0.2, Top Layer to Bottom Layer, 334 vias
v2: diameter 0.38, hole 0.2, Top Layer to Bottom Layer, 21 vias
v3: diameter 1.27, hole 0.711, Top Layer to Bottom Layer, 7 vias
v4: diameter 0.4, hole 0.22, Top Layer to Bottom Layer, 4 vias

## Nets (pads, with @x,y where several pads share a name; then routed paths per layer and width w, separated by ;. In a path a pad name is that pad's centre, name@x,y a point inside that pad or via, vN(x,y) a via of type N, cw(c..) or ccw(c..) an arc to the next point about the centre after c; other vN are vias at no path point)
1V8: C7.1 L1.2 R14.1 TP4.1 U4.D1 | length 29.2
  Top Layer w0.09: L1.2@12.564,10.871 13.199,10.871 13.469,11.142 13.469,11.8 13.87,12.2 15.207,12.2 15.407,12 U4.D1@15.9,12
  Top Layer w0.2: v1(11.975,7.225) 12.381,7.225 12.802,7.645 12.802,8.712 12.979,8.89 ; v1(29.075,7.1) 29.1,7.125 29.858,7.125 R14.1@31.064,8.331 R14.1@31.09,8.306
  Bottom Layer w0.2: v1(11.975,7.225) 11.975,7.188 12.688,6.475 12.725,6.475 TP4.1@12.725,6.4 13.65,5.475 15.4,5.475 17.1,3.775 25.75,3.775 v1(29.075,7.1)
3.3VDD: C9.1 C17.1 C18.1 C19.1 C20.1 C21.1 C22.1 C23.1 P1.1 R16.1 R17.2 STM32.11 STM32.28 STM32.41 STM32.44 STM32.46 TP7.1 U3.2 U4.A3 | length 29
  Top Layer w0.09: U4.A3@16.696,13.196 16.7,13.2 16.7,13.982 16.916,14.199 16.916,14.8 17.016,14.9 C9.1@17.018,14.898
  Top Layer w0.102: R16.1@3.226,34.849 R16.1@3.251,34.874 ; C9.1@16.713,14.884 16.739,14.884 16.942,15.088 v1(16.942,16.332) ; v1(20.041,35.941) v1@20.091,35.941 ; STM32.28@20.9,36.75 STM32.28@21.025,36.75 ; v1(25.121,30.886) v1@25.135,30.901 ; STM32.44@25.135,32.11 STM32.44@25.15,32.125 ; STM32.11@27.775,37.75 27.791,37.734 29.322,37.734 v1(29.337,37.719) ; C22.1@33.958,19.103 C22.1@33.96,19.101 ; C23.1@35.458,19.101 C23.1@35.484,19.075
  Top Layer w0.2: R17.2@3.15,29.87 3.124,29.845 3.124,26.645 4.445,25.324 4.445,23.851 ; v1(3.226,32.791) R16.1@3.226,34.849 ; v1(3.734,23.851) 4.445,23.851 ; P1.1@4.445,20.244 4.445,23.851 ; v1@20.091,35.941 STM32.28@20.9,36.75 ; v1(23.317,30.988) 23.65,31.321 STM32.41@23.65,32.125 ; v1@25.135,30.901 STM32.44@25.135,32.11 ; v1(25.959,29.896) 25.959,30.988 26.15,31.179 STM32.46@26.15,32.125 ; C23.1@35.484,19.075 35.509,19.05 v1(37.225,19.05) ; v1(43.79,33.172) 44.247,33.172 U3.2@44.926,32.493
  Bottom Layer w0.2: v1(41.425,11.85) 42.6,11.85 42.775,11.675 TP7.1@42.975,11.875
ADP_INT: STM32.16 U4.A6 | length 32.4
  Top Layer w0.09: U4.A6@17.896,13.196 18.745,14.045 18.745,17.526 19.126,17.907 v1(19.126,18.491) ; STM32.16@25.65,38.875 STM32.16@25.65,39
  Top Layer w0.2: STM32.16@25.65,39 v1(26.75,40.1)
  Bottom Layer w0.2: v1(19.126,18.491) 19.174,18.539 19.352,18.539 22.022,21.209 22.022,35.331 26.75,40.06 v1(26.75,40.1)
ADXL362_CS: STM32.14 U1.8 | length 24.8
  Top Layer w0.2: STM32.14@26.65,38.875 26.7,38.925 26.7,39.05 27.369,39.719 27.369,39.747 27.738,40.116 31.461,40.116 v1(36.03,35.547) ; v1(43.959,27.186) U1.8@44.801,27.186
  Bottom Layer w0.2: v1(36.03,35.547) 36.843,35.547 43.959,28.431 v1(43.959,27.186)
ADXL362_INT1: STM32.31 U1.11 | length 45
  Top Layer w0.2: STM32.31@21.025,35.25 20.543,35.25 20.091,34.798 18.237,34.798 17.729,34.29 17.729,33.579 18.212,33.096 18.212,29.54 v1(22.428,25.324) ; U1.11@46.076,26.398 46.125,26.349 v1(46.125,25.275)
  Bottom Layer w0.102: v1(22.428,25.324) v1@22.45,25.302
  Bottom Layer w0.2: v1@22.45,25.302 22.806,25.302 23.927,24.181 34.188,24.181 37.059,21.311 45.356,21.311 46.616,22.57 46.616,23.346 46.125,23.837 v1(46.125,25.275)
ADXL372_CS: STM32.5 U2.8 | length 22.4
  Top Layer w0.2: STM32.5@27.775,34.75 29.715,34.75 29.718,34.747 30.124,34.747 v1(30.15,34.773) ; v1(42.799,22.123) 42.803,22.127 44.898,22.127 U2.8@44.902,22.131
  Bottom Layer w0.2: v1(30.15,34.773) v1(42.799,22.123)
ADXL372_INT1: STM32.34 U2.11 | length 36.5
  Top Layer w0.2: STM32.34@21.025,33.75 20.459,33.75 19.833,33.124 19.833,29.85 v1(22.911,26.772) ; v1(34.671,25.451) 36.246,23.876 38.76,23.876 42.901,19.736 45.466,19.736 46.177,20.447 U2.11@46.177,21.344
  Bottom Layer w0.2: v1(22.911,26.772) 24.232,25.451 v1(34.671,25.451)
BSNS: C14.1 STM32.37 SW2.1 TP13.1 U4.C6 U4.D6 | length 39.9
  Top Layer w0.09: U4.D6@17.896,11.996 U4.C6@17.896,12.396 ; U4.C6@17.957,12.4 18.137,12.4 20.028,14.29 ; 20.028,14.291 20.1,14.364 20.228,14.364 20.237,14.373 20.237,14.5 C14.1@20.3,14.5
  Top Layer w0.2: v1(16.739,6.5) 16.787,6.452 16.887,6.452 SW2.1@17.795,5.545 ; SW2.1@17.795,5.445 SW2.1@17.795,5.545 ; 20.193,14.808 20.32,14.935 20.472,14.935 20.955,15.418 ; v1(20.98,29.794) 20.98,31.455 STM32.37@21.65,32.125 ; v1(21.371,21.955) 20.955,21.539 20.955,15.418 ; SW2.1@17.795,5.545 18.65,6.4 21.405,6.4 22.53,7.525 22.53,15.301 22.413,15.418 20.955,15.418
  Bottom Layer w0.2: TP13.1@15.35,6.5 v1(16.739,6.5) ; v1(20.98,29.794) 20.98,22.682 21.371,22.292 v1(21.371,21.955)
EN1: R6.2
EN2: R10.2 U4.B4 | length 13.8
  Top Layer w0.09: v4(17.096,12.429) U4.B4@17.096,12.796
  Top Layer w0.2: v1(21.925,17.325) 26.262,17.325 R10.2@27.483,16.104
  Bottom Layer w0.09: v4@17.121,12.429 v4(17.096,12.429) 17.096,13.196 21.225,17.325 v1(21.925,17.325)
ENCHG: R5.2 U4.F3 | length 14
  Top Layer w0.09: U4.F3@16.696,11.196 16.705,11.187 16.705,10.956 17.501,10.16 v1(17.501,9.677)
  Top Layer w0.2: v1(26.086,9.093) 26.086,10.414 R5.2@27.5,11.828
  Bottom Layer w0.2: v1(17.501,9.677) 17.548,9.63 17.713,9.63 17.743,9.6 24.868,9.6 25.375,9.093 v1(26.086,9.093)